# Altium PCB lab1_kondratchenko_usb_rs485.PcbDoc
Units mm, origin at the board's own origin, x right, y up, seen from the top; angles counter-clockwise.
Board outline 52 x 29 mm, 4 copper layers (Top Layer, Signal Layer 1, Signal Layer 2, Bottom Layer), stack 1.522 mm thick; 23 components, 21 nets, 107 pads, 0 vias.
Unrouted connection lines stored in the file: 1.
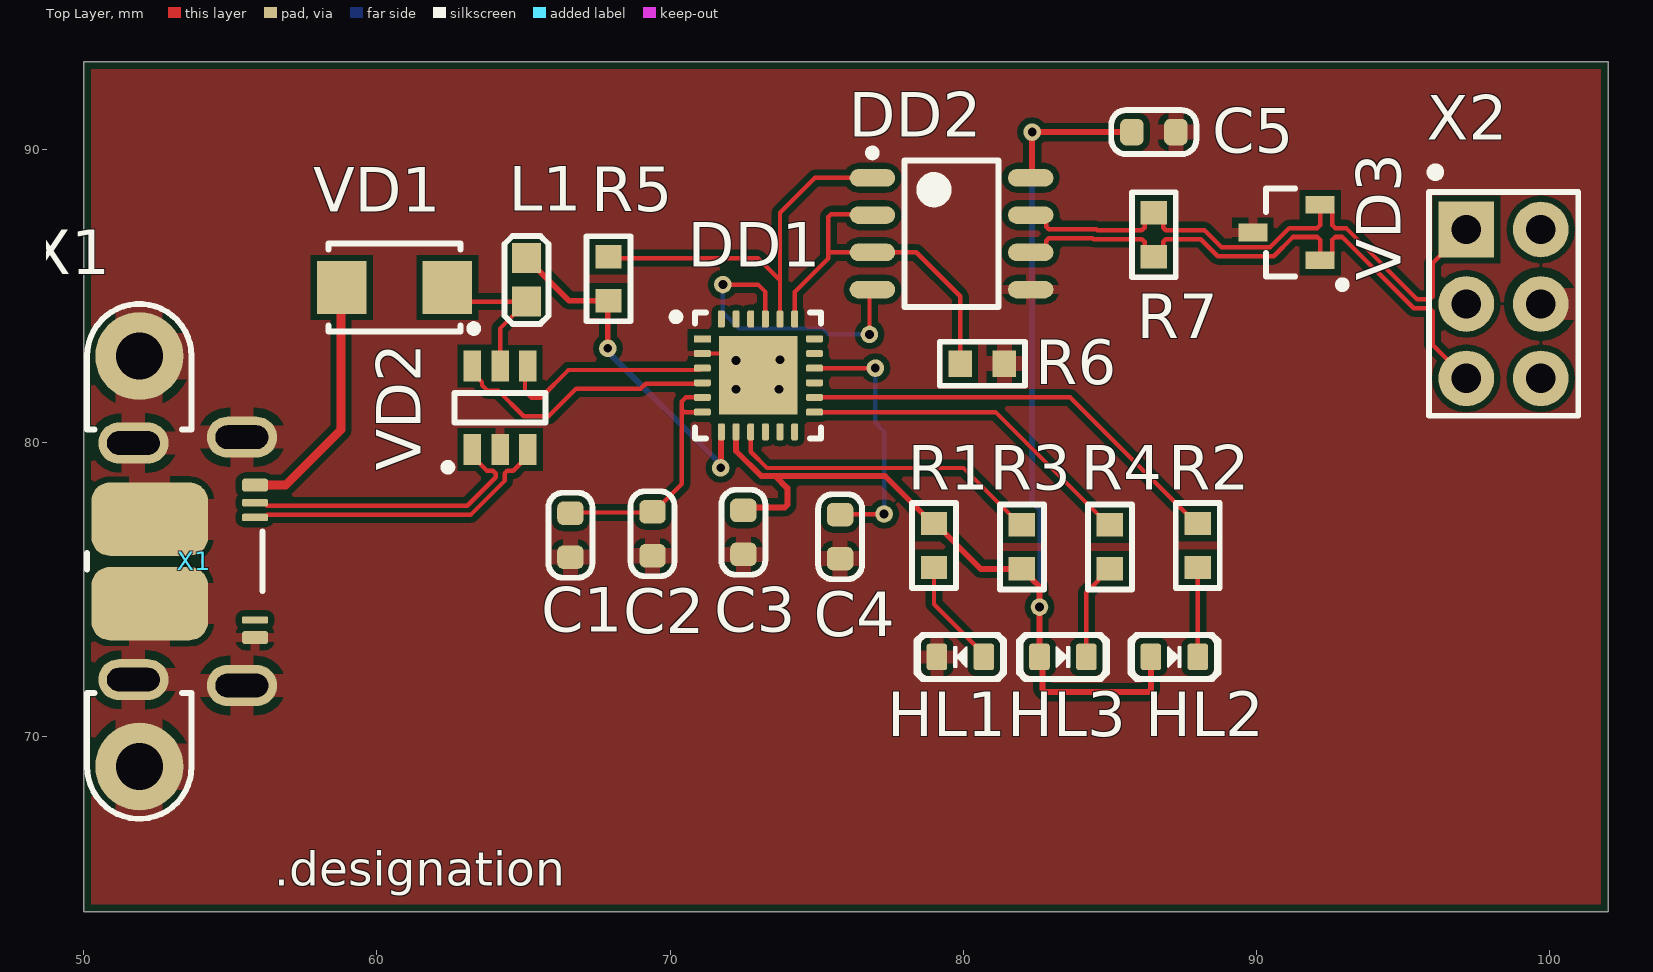
[diagram p0: Top Layer view]
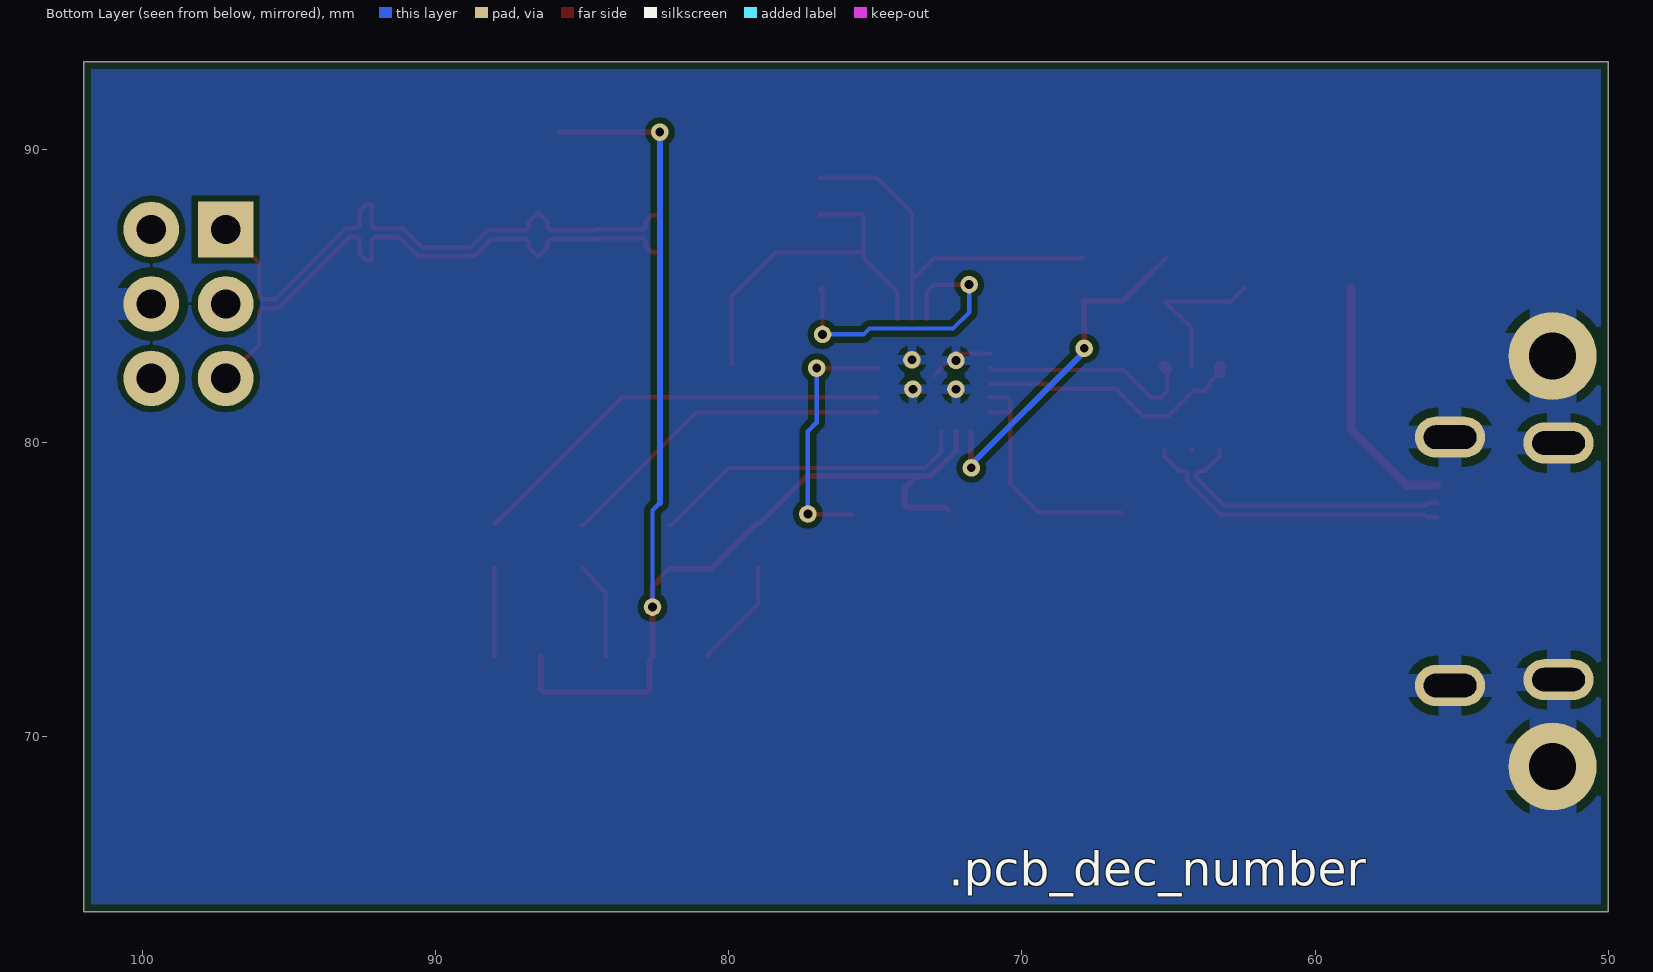
[diagram p1: Bottom Layer view, seen from below]

## Layer stack, top to bottom
Top Solder: solder mask 0.0102, Solder Resist, Dk 3.5
Top Layer: signal copper 0.018
Prepreg 1: prepreg 0.125, FR4 HiTg170, Dk 5.07
Signal Layer 1: signal copper 0.018
Core 1: core 1.2, FR4, Dk 4.6
Signal Layer 2: signal copper 0.018
Prepreg 2: prepreg 0.125, FR4 HiTg170, Dk 5.07
Bottom Layer: signal copper 0.018
Bottom Solder: solder mask 0.0102, Solder Resist, Dk 3.5

## Board outline
50,93 102,93 102,64 50,64

## Design rules (kind name [scope] priority, off if disabled: settings)
AcuteAngle min_acute_angle [OnCopper] p1: minimum=3.50000000000000E+0001 checktracksonly=FALSE // Минимальный угол между примитивами топологии
BoardOutlineClearance board_outline_clearance_std [NOT (OnLayer('Bottom Overlay') OR OnLayer('Top Overlay'))] p1: gap=0.25 ignorepadtopadclearanceinfootprint=FALSE except(0: Arc-SplitContinuation Track-SplitContinuation SMDPad-SplitContinuation THPad-SplitContinuation Via-SplitContinuation Fill-SplitContinuation Poly-SplitContinuation Region-SplitContinuation Text-SplitContinuation) // Отступ элементов топологии от края фрезеруемой печатной платы
Clearance clearance_outer_18um_std [OnTopLayer OR OnBottomLayer] p1: gap=0.125 ignorepadtopadclearanceinfootprint=TRUE except(0.2: Arc-Fill Arc-Poly Track-Fill Track-Poly SMDPad-SMDPad SMDPad-Fill SMDPad-Poly THPad-Fill THPad-Poly Via-Fill Via-Poly Fill-Fill Fill-Poly Poly-Poly Poly-Region Poly-Text; 0.25: Arc-Hole Track-Hole SMDPad-Hole THPad-Hole Via-Hole Fill-Hole Poly-Hole Region-Hole Text-Hole) // Зазоры на внешних слоях
Clearance clearance_inner_18um_std [NOT (OnTopLayer Or OnBottomLayer)] p2: gap=0.125 ignorepadtopadclearanceinfootprint=FALSE except(0.2: Arc-Fill Arc-Poly Track-Fill Track-Poly SMDPad-SMDPad SMDPad-Fill SMDPad-Poly THPad-Fill THPad-Poly Via-Fill Via-Poly Fill-Fill Fill-Poly Poly-Poly Poly-Region Poly-Text; 0.25: Arc-Hole Track-Hole SMDPad-Hole THPad-Hole Via-Hole Fill-Hole Poly-Hole Region-Hole Text-Hole) // Зазоры на внутренних слоях
ComponentClearance [All] p1: gap=0 collisioncheckmode=3 verticalgap=0 showdistances=FALSE
DiffPairsRouting [InDifferentialPair ('USB_D')] p1: maxlimit=0.254 minlimit=0.254 mostfreqgap=0.254 toplayer_minwidth=0.381 toplayer_maxwidth=0.381 toplayer_prefwidth=0.381 midlayer1_minwidth=0.381 midlayer1_maxwidth=0.381 midlayer1_prefwidth=0.381 midlayer2_minwidth=0.381 midlayer2_maxwidth=0.381 midlayer2_prefwidth=0.381 bottomlayer_minwidth=0.381 bottomlayer_maxwidth=0.381 bottomlayer_prefwidth=0.381 maxuncoupledlength=12.7
DiffPairsRouting "Schematic Differential Pairs Routing_5" [InNet('CN_D_N')] p2: maxlimit=0.254 minlimit=0.15 mostfreqgap=0.254 substack1={67195EEF-3907-44E9-BDDF-A21B55EA62EA} substack2={CDF0D0DA-B555-4F8A-8FB6-4BBC3EEBB904} substack3={CB64AA8D-8A62-4D38-B05B-D89D081F4C4C} substack4={ADF6C17C-3291-4EF0-89AD-1B4AAFEC95EE} toplayer_maxgap=0.15 toplayer_prefgap=0.15 toplayer_minwidth=0.155 toplayer_maxwidth=0.155 toplayer_prefwidth=0.155 bottomlayer_maxgap=0.15 bottomlayer_prefgap=0.15 bottomlayer_minwidth=0.155 bottomlayer_maxwidth=0.155 bottomlayer_prefwidth=0.155 substack5={ADBE2DFC-6407-496F-873F-9348D0F1B764} substack6={5F7ABF9E-679D-4FCA-8030-36A110D09790} substack7={999D9EF6-EDBB-4A89-A475-10066F858756} substack8={6E450970-51B5-4B14-929E-B3EE18E1EAC7} impedanceprofiledriven=TRUE impedanceprofileid={1B1F1868-2FFB-4D51-908A-913D90CA9AFC} impedanceprofilevalue=95.000000 maxuncoupledlength=12.7
DiffPairsRouting "Schematic Differential Pairs Routing_4" [InNet('CN_D_P')] p3: maxlimit=0.254 minlimit=0.15 mostfreqgap=0.254 substack1={67195EEF-3907-44E9-BDDF-A21B55EA62EA} substack2={CDF0D0DA-B555-4F8A-8FB6-4BBC3EEBB904} substack3={CB64AA8D-8A62-4D38-B05B-D89D081F4C4C} substack4={ADF6C17C-3291-4EF0-89AD-1B4AAFEC95EE} toplayer_maxgap=0.15 toplayer_prefgap=0.15 toplayer_minwidth=0.155 toplayer_maxwidth=0.155 toplayer_prefwidth=0.155 bottomlayer_maxgap=0.15 bottomlayer_prefgap=0.15 bottomlayer_minwidth=0.155 bottomlayer_maxwidth=0.155 bottomlayer_prefwidth=0.155 substack5={ADBE2DFC-6407-496F-873F-9348D0F1B764} substack6={5F7ABF9E-679D-4FCA-8030-36A110D09790} substack7={999D9EF6-EDBB-4A89-A475-10066F858756} substack8={6E450970-51B5-4B14-929E-B3EE18E1EAC7} impedanceprofiledriven=TRUE impedanceprofileid={1B1F1868-2FFB-4D51-908A-913D90CA9AFC} impedanceprofilevalue=95.000000 maxuncoupledlength=12.7
DiffPairsRouting "Schematic Differential Pairs Routing_3" [InNet('RS485_N')] p4: maxlimit=0.254 minlimit=0.15 mostfreqgap=0.254 substack1={67195EEF-3907-44E9-BDDF-A21B55EA62EA} substack2={CDF0D0DA-B555-4F8A-8FB6-4BBC3EEBB904} substack3={CB64AA8D-8A62-4D38-B05B-D89D081F4C4C} substack4={ADF6C17C-3291-4EF0-89AD-1B4AAFEC95EE} toplayer_maxgap=0.15 toplayer_prefgap=0.15 toplayer_minwidth=0.155 toplayer_maxwidth=0.155 toplayer_prefwidth=0.155 bottomlayer_maxgap=0.15 bottomlayer_prefgap=0.15 bottomlayer_minwidth=0.155 bottomlayer_maxwidth=0.155 bottomlayer_prefwidth=0.155 substack5={ADBE2DFC-6407-496F-873F-9348D0F1B764} substack6={5F7ABF9E-679D-4FCA-8030-36A110D09790} substack7={999D9EF6-EDBB-4A89-A475-10066F858756} substack8={6E450970-51B5-4B14-929E-B3EE18E1EAC7} impedanceprofiledriven=TRUE impedanceprofileid={1B1F1868-2FFB-4D51-908A-913D90CA9AFC} impedanceprofilevalue=95.000000 maxuncoupledlength=12.7
DiffPairsRouting "Schematic Differential Pairs Routing_2" [InNet('RS485_P')] p5: maxlimit=0.254 minlimit=0.15 mostfreqgap=0.254 substack1={67195EEF-3907-44E9-BDDF-A21B55EA62EA} substack2={CDF0D0DA-B555-4F8A-8FB6-4BBC3EEBB904} substack3={CB64AA8D-8A62-4D38-B05B-D89D081F4C4C} substack4={ADF6C17C-3291-4EF0-89AD-1B4AAFEC95EE} toplayer_maxgap=0.15 toplayer_prefgap=0.15 toplayer_minwidth=0.155 toplayer_maxwidth=0.155 toplayer_prefwidth=0.155 bottomlayer_maxgap=0.15 bottomlayer_prefgap=0.15 bottomlayer_minwidth=0.155 bottomlayer_maxwidth=0.155 bottomlayer_prefwidth=0.155 substack5={ADBE2DFC-6407-496F-873F-9348D0F1B764} substack6={5F7ABF9E-679D-4FCA-8030-36A110D09790} substack7={999D9EF6-EDBB-4A89-A475-10066F858756} substack8={6E450970-51B5-4B14-929E-B3EE18E1EAC7} impedanceprofiledriven=TRUE impedanceprofileid={1B1F1868-2FFB-4D51-908A-913D90CA9AFC} impedanceprofilevalue=95.000000 maxuncoupledlength=12.7
DiffPairsRouting "Schematic Differential Pairs Routing_1" [InNet('USB_D_N')] p6: maxlimit=0.254 minlimit=0.15 mostfreqgap=0.254 substack1={67195EEF-3907-44E9-BDDF-A21B55EA62EA} substack2={CDF0D0DA-B555-4F8A-8FB6-4BBC3EEBB904} substack3={CB64AA8D-8A62-4D38-B05B-D89D081F4C4C} substack4={ADF6C17C-3291-4EF0-89AD-1B4AAFEC95EE} toplayer_maxgap=0.15 toplayer_prefgap=0.15 toplayer_minwidth=0.155 toplayer_maxwidth=0.155 toplayer_prefwidth=0.155 bottomlayer_maxgap=0.15 bottomlayer_prefgap=0.15 bottomlayer_minwidth=0.155 bottomlayer_maxwidth=0.155 bottomlayer_prefwidth=0.155 substack5={ADBE2DFC-6407-496F-873F-9348D0F1B764} substack6={5F7ABF9E-679D-4FCA-8030-36A110D09790} substack7={999D9EF6-EDBB-4A89-A475-10066F858756} substack8={6E450970-51B5-4B14-929E-B3EE18E1EAC7} impedanceprofiledriven=TRUE impedanceprofileid={1B1F1868-2FFB-4D51-908A-913D90CA9AFC} impedanceprofilevalue=95.000000 maxuncoupledlength=12.7
DiffPairsRouting "Schematic Differential Pairs Routing" [InNet('USB_D_P')] p7: maxlimit=0.254 minlimit=0.15 mostfreqgap=0.254 substack1={67195EEF-3907-44E9-BDDF-A21B55EA62EA} substack2={CDF0D0DA-B555-4F8A-8FB6-4BBC3EEBB904} substack3={CB64AA8D-8A62-4D38-B05B-D89D081F4C4C} substack4={ADF6C17C-3291-4EF0-89AD-1B4AAFEC95EE} toplayer_maxgap=0.15 toplayer_prefgap=0.15 toplayer_minwidth=0.155 toplayer_maxwidth=0.155 toplayer_prefwidth=0.155 bottomlayer_maxgap=0.15 bottomlayer_prefgap=0.15 bottomlayer_minwidth=0.155 bottomlayer_maxwidth=0.155 bottomlayer_prefwidth=0.155 substack5={ADBE2DFC-6407-496F-873F-9348D0F1B764} substack6={5F7ABF9E-679D-4FCA-8030-36A110D09790} substack7={999D9EF6-EDBB-4A89-A475-10066F858756} substack8={6E450970-51B5-4B14-929E-B3EE18E1EAC7} impedanceprofiledriven=TRUE impedanceprofileid={1B1F1868-2FFB-4D51-908A-913D90CA9AFC} impedanceprofilevalue=95.000000 maxuncoupledlength=12.7
DiffPairsRouting diff_pairs_routing [All] p8: maxlimit=0.254 minlimit=0.127 mostfreqgap=0.254 toplayer_maxgap=0.127 toplayer_prefgap=0.127 toplayer_minwidth=0.143 toplayer_maxwidth=0.143 toplayer_prefwidth=0.143 midlayer1_minwidth=0.381 midlayer1_maxwidth=0.381 midlayer1_prefwidth=0.381 midlayer2_minwidth=0.381 midlayer2_maxwidth=0.381 midlayer2_prefwidth=0.381 bottomlayer_maxgap=0.127 bottomlayer_prefgap=0.127 bottomlayer_minwidth=0.143 bottomlayer_maxwidth=0.143 bottomlayer_prefwidth=0.143 impedanceprofiledriven=TRUE impedanceprofileid={FD46899E-B5A2-4EF5-A302-5D2DB6A51F35} maxuncoupledlength=12.7 // Правила трассировки дифференциальных пар
HoleSize min_hole_size_std [IsPad] p1: absolutevalues=TRUE maxlimit=5.9 minlimit=0.6 maxpercent=80.000 minpercent=20.000 // Диаметр межслойного переходного отверстия
HoleSize min_hole_size_via_std [IsVia] p2: absolutevalues=TRUE maxlimit=5.9 minlimit=0.3 maxpercent=80.000 minpercent=20.000 // Минимальный диаметр монтажного отверстия
HoleToHoleClearance hole_to_hole_clearance_std [All] p1: gap=0.2 allowstackedmicrovias=FALSE // Минимальное расстояние между краями двух отверстий
MatchedLengths [InDifferentialPair ('USB_D')] p1: tolerance=25.4 checknetsindiffpair=FALSE checkdiffpairvsdiffpair=TRUE checkxsignals=TRUE checkothers=TRUE
MinimumAnnularRing min_via_ar_std [All] p1: minimumring=0.15 // Поясок площадки переходного отверстия (Annular ring VIA)
MinimumAnnularRing min_pad_ar_std [All] p2: minimumring=0.2 // Поясок монтажной контактной площадки (Annular ring PAD)
MinimumSolderMaskSliver min_solder_mask_bridge_std [All] p1: minsoldermaskwidth=0.15 // Мнимальная ширина масочного мостика
PlaneClearance plane_clearance_18um_std [All] p1: clearance=0.2 // Отступ полигона (для слоя plane) от элементов топологии
PlaneConnect [All] p1: planeconnectstyle=Relief reliefexpansion=0.5 reliefentries=4 reliefconductorwidth=0.2 reliefairgap=0.2
PolygonConnect poly_connect_to_pad<=0.3 [(AsMM(PadXSize_AllLayers)<=0.301) or (AsMM(PadYSize_AllLayers)<=0.301)] p1: thpad.connectstyle=Relief thpad.reliefconductorwidth=0.2 thpad.reliefentries=4 thpad.polygonreliefangle="90 Angle" thpad.airgapwidth=0.2 smdpad.connectstyle=Relief smdpad.reliefconductorwidth=0.2 smdpad.reliefentries=4 smdpad.polygonreliefangle="90 Angle" smdpad.airgapwidth=0.2 via.connectstyle=Direct via.reliefconductorwidth=0.254 via.reliefentries=4 via.polygonreliefangle="90 Angle" via.airgapwidth=0.254 // Правила подключения полигонов для падов от 0,3мм и меньше
PolygonConnect poly_connect_to_pad<=0.4 [(AsMM(PadXSize_AllLayers)<=0.401) or (AsMM(PadYSize_AllLayers)<=0.401)] p2: thpad.connectstyle=Relief thpad.reliefconductorwidth=0.26 thpad.reliefentries=4 thpad.polygonreliefangle="90 Angle" thpad.airgapwidth=0.2 smdpad.connectstyle=Relief smdpad.reliefconductorwidth=0.26 smdpad.reliefentries=4 smdpad.polygonreliefangle="90 Angle" smdpad.airgapwidth=0.2 via.connectstyle=Direct via.reliefconductorwidth=0.254 via.reliefentries=4 via.polygonreliefangle="90 Angle" via.airgapwidth=0.254 // Правила подключения полигонов для падов от 0,4 и меньше
PolygonConnect poly_connect_to_pad<=0.6 [(AsMM(PadXSize_AllLayers)<=0.601) or (AsMM(PadYSize_AllLayers)<=0.601)] p3: thpad.connectstyle=Relief thpad.reliefconductorwidth=0.33 thpad.reliefentries=4 thpad.polygonreliefangle="90 Angle" thpad.airgapwidth=0.2 smdpad.connectstyle=Relief smdpad.reliefconductorwidth=0.33 smdpad.reliefentries=4 smdpad.polygonreliefangle="90 Angle" smdpad.airgapwidth=0.2 via.connectstyle=Direct via.reliefconductorwidth=0.254 via.reliefentries=4 via.polygonreliefangle="90 Angle" via.airgapwidth=0.254 // Правила подключения полигонов для падов от 0,6мм и меньше
PolygonConnect poly_connect_to_pad<=0.7 [(AsMM(PadXSize_AllLayers)<=0.701) or (AsMM(PadYSize_AllLayers)<=0.701)] p4: thpad.connectstyle=Relief thpad.reliefconductorwidth=0.46 thpad.reliefentries=4 thpad.polygonreliefangle="90 Angle" thpad.airgapwidth=0.2 smdpad.connectstyle=Relief smdpad.reliefconductorwidth=0.46 smdpad.reliefentries=4 smdpad.polygonreliefangle="90 Angle" smdpad.airgapwidth=0.2 via.connectstyle=Direct via.reliefconductorwidth=0.254 via.reliefentries=4 via.polygonreliefangle="90 Angle" via.airgapwidth=0.254 // Правила подключения полигонов для падов от 0,7мм и меньше
PolygonConnect poly_connect_to_pad<=0.8 [(AsMM(PadXSize_AllLayers)<=0.8)or(AsMM(PadYSize_AllLayers)<=0.8)] p5: thpad.connectstyle=Relief thpad.reliefconductorwidth=0.53 thpad.reliefentries=4 thpad.polygonreliefangle="90 Angle" thpad.airgapwidth=0.3 smdpad.connectstyle=Relief smdpad.reliefconductorwidth=0.53 smdpad.reliefentries=4 smdpad.polygonreliefangle="90 Angle" smdpad.airgapwidth=0.2 via.connectstyle=Direct via.reliefconductorwidth=0.254 via.reliefentries=4 via.polygonreliefangle="90 Angle" via.airgapwidth=0.254 // Правила подключения полигонов для падов от 0,8мм и меньше
PolygonConnect poly_connect_to_pad<=1 [(AsMM(PadXSize_AllLayers)<=1.01)or(AsMM(PadYSize_AllLayers)<=1.01)] p6: thpad.connectstyle=Relief thpad.reliefconductorwidth=0.6 thpad.reliefentries=4 thpad.polygonreliefangle="90 Angle" thpad.airgapwidth=0.3 smdpad.connectstyle=Relief smdpad.reliefconductorwidth=0.6 smdpad.reliefentries=4 smdpad.polygonreliefangle="90 Angle" smdpad.airgapwidth=0.2 via.connectstyle=Direct via.reliefconductorwidth=0.254 via.reliefentries=4 via.polygonreliefangle="90 Angle" via.airgapwidth=0.254 // Правила подключения полигонов для падов от 1мм и меньше
PolygonConnect poly_connect_to_pad<=1.3 [(AsMM(PadXSize_AllLayers)<=1.31)or(AsMM(PadYSize_AllLayers)<=1.31)] p7: thpad.connectstyle=Relief thpad.reliefconductorwidth=0.66 thpad.reliefentries=4 thpad.polygonreliefangle="90 Angle" thpad.airgapwidth=0.3 smdpad.connectstyle=Relief smdpad.reliefconductorwidth=0.86 smdpad.reliefentries=4 smdpad.polygonreliefangle="90 Angle" smdpad.airgapwidth=0.2 via.connectstyle=Direct via.reliefconductorwidth=0.254 via.reliefentries=4 via.polygonreliefangle="90 Angle" via.airgapwidth=0.254 // Правила подключения полигонов для падов от 1,3мм и меньше
PolygonConnect poly_connect_to_pad<=1.6 [(AsMM(PadXSize_AllLayers)<=1.61)or(AsMM(PadYSize_AllLayers)<=1.61)] p8: thpad.connectstyle=Relief thpad.reliefconductorwidth=0.8 thpad.reliefentries=4 thpad.polygonreliefangle="90 Angle" thpad.airgapwidth=0.3 smdpad.connectstyle=Relief smdpad.reliefconductorwidth=1 smdpad.reliefentries=4 smdpad.polygonreliefangle="90 Angle" smdpad.airgapwidth=0.2 via.connectstyle=Direct via.reliefconductorwidth=0.254 via.reliefentries=4 via.polygonreliefangle="90 Angle" via.airgapwidth=0.254 // Правила подключения полигонов для падов от 1,6мм и меньше
PolygonConnect poly_connect_to_pad<=1.8 [(AsMM(PadXSize_AllLayers)<=1.8)or(AsMM(PadYSize_AllLayers)<=1.8)] p9: thpad.connectstyle=Relief thpad.reliefconductorwidth=1 thpad.reliefentries=4 thpad.polygonreliefangle="90 Angle" thpad.airgapwidth=0.3 smdpad.connectstyle=Relief smdpad.reliefconductorwidth=1.2 smdpad.reliefentries=4 smdpad.polygonreliefangle="90 Angle" smdpad.airgapwidth=0.2 via.connectstyle=Direct via.reliefconductorwidth=0.254 via.reliefentries=4 via.polygonreliefangle="90 Angle" via.airgapwidth=0.254 // Правила подключения полигонов для падов от 1,8мм и меньше
PolygonConnect poly_connect_to_pad<=2 [(AsMM(PadXSize_AllLayers)<=2.01)or(AsMM(PadYSize_AllLayers)<=2.01)] p10: thpad.connectstyle=Relief thpad.reliefconductorwidth=1.1 thpad.reliefentries=4 thpad.polygonreliefangle="90 Angle" thpad.airgapwidth=0.3 smdpad.connectstyle=Relief smdpad.reliefconductorwidth=1.4 smdpad.reliefentries=4 smdpad.polygonreliefangle="90 Angle" smdpad.airgapwidth=0.2 via.connectstyle=Direct via.reliefconductorwidth=0.254 via.reliefentries=4 via.polygonreliefangle="90 Angle" via.airgapwidth=0.254 // Правила подключения полигонов для падов от 2мм и меньше
PolygonConnect poly_connect_to_pad<=2.3 [(AsMM(PadXSize_AllLayers)<=2.31)or(AsMM(PadYSize_AllLayers)<=2.31)] p11: thpad.connectstyle=Relief thpad.reliefconductorwidth=1.2 thpad.reliefentries=4 thpad.polygonreliefangle="90 Angle" thpad.airgapwidth=0.3 smdpad.connectstyle=Relief smdpad.reliefconductorwidth=1.4 smdpad.reliefentries=4 smdpad.polygonreliefangle="90 Angle" smdpad.airgapwidth=0.2 via.connectstyle=Direct via.reliefconductorwidth=0.254 via.reliefentries=4 via.polygonreliefangle="90 Angle" via.airgapwidth=0.254 // Правила подключения полигонов для падов от 2,3мм и меньше
PolygonConnect poly_connect_to_pad<=2.5 [(AsMM(PadXSize_AllLayers)<=2.51)or(AsMM(PadYSize_AllLayers)<=2.51)] p12: thpad.connectstyle=Relief thpad.reliefconductorwidth=1.2 thpad.reliefentries=4 thpad.polygonreliefangle="90 Angle" thpad.airgapwidth=0.3 smdpad.connectstyle=Relief smdpad.reliefconductorwidth=1.4 smdpad.reliefentries=4 smdpad.polygonreliefangle="90 Angle" smdpad.airgapwidth=0.2 via.connectstyle=Direct via.reliefconductorwidth=0.254 via.reliefentries=4 via.polygonreliefangle="90 Angle" via.airgapwidth=0.254 // Правила подключения полигонов для падов от 2,5мм и меньше
PolygonConnect poly_connect_to_pad<=2.7 [(AsMM(PadXSize_AllLayers)<=2.71)or(AsMM(PadYSize_AllLayers)<=2.71)] p13: thpad.connectstyle=Relief thpad.reliefconductorwidth=1.4 thpad.reliefentries=4 thpad.polygonreliefangle="90 Angle" thpad.airgapwidth=0.3 smdpad.connectstyle=Relief smdpad.reliefconductorwidth=1.6 smdpad.reliefentries=4 smdpad.polygonreliefangle="90 Angle" smdpad.airgapwidth=0.2 via.connectstyle=Direct via.reliefconductorwidth=0.254 via.reliefentries=4 via.polygonreliefangle="90 Angle" via.airgapwidth=0.254 // Правила подключения полигонов для падов от 2,7мм и меньше
PolygonConnect poly_connect_to_pad<=3 [(AsMM(PadXSize_AllLayers)<=3.01)or(AsMM(PadYSize_AllLayers)<=3.01)] p14: thpad.connectstyle=Relief thpad.reliefconductorwidth=1.6 thpad.reliefentries=4 thpad.polygonreliefangle="90 Angle" thpad.airgapwidth=0.3 smdpad.connectstyle=Relief smdpad.reliefconductorwidth=1.8 smdpad.reliefentries=4 smdpad.polygonreliefangle="90 Angle" smdpad.airgapwidth=0.2 via.connectstyle=Direct via.reliefconductorwidth=0.254 via.reliefentries=4 via.polygonreliefangle="90 Angle" via.airgapwidth=0.254 // Правила подключения полигонов для падов от 3мм и меньше
PolygonConnect poly_connect_to_pad<=7 [(AsMM(PadXSize_AllLayers)<7.01)or(AsMM(PadYSize_AllLayers)<=7.01)] p15: thpad.connectstyle=Relief thpad.reliefconductorwidth=2 thpad.reliefentries=4 thpad.polygonreliefangle="90 Angle" thpad.airgapwidth=0.4 smdpad.connectstyle=Relief smdpad.reliefconductorwidth=2 smdpad.reliefentries=4 smdpad.polygonreliefangle="90 Angle" smdpad.airgapwidth=0.3 via.connectstyle=Direct via.reliefconductorwidth=0.254 via.reliefentries=4 via.polygonreliefangle="90 Angle" via.airgapwidth=0.254 // Правила подключения полигонов для падов от 7мм и меньше
PolygonConnect poly_connect_to_pad [All] p16: thpad.connectstyle=Relief thpad.reliefconductorwidth=0.25 thpad.reliefentries=4 thpad.polygonreliefangle="90 Angle" thpad.airgapwidth=0.2 smdpad.connectstyle=Relief smdpad.reliefconductorwidth=0.25 smdpad.reliefentries=4 smdpad.polygonreliefangle="90 Angle" smdpad.airgapwidth=0.2 via.connectstyle=Direct via.reliefconductorwidth=0.25 via.reliefentries=4 via.polygonreliefangle="90 Angle" via.airgapwidth=0.2 // Правила подключения полигонов общие
RoutingCorners [All] p1 off: cornerstyle=45-Degree minsetback=2.5 maxsetback=2.5
RoutingVias [All] p1: holewidth=0.3 width=0.6 viastyle="Through Hole" minholewidth=0.3 minwidth=0.6 maxholewidth=5.9 maxwidth=6.4
SilkToSilkClearance silk_to_silk_clearance_std [All] p1 off: silktosilkclearance=0.15 // Отступ текста шелкографии от других примитивов шелкографии
SilkToSolderMaskClearance silk_to_solder_mask_clearance_std [IsPad] p1 off: minsilkscreentomaskgap=0.15 clearancetoexposedcopper=FALSE // Минимальное расстояние между элементами шелкографии и вскрытой медью
SolderMaskExpansion solder_mask_expansion_std [All] p1: expansion=0.05 // Припуск паяльной масски
UnRoutedNet [All] p1: checkbadconnections=TRUE
Width width_18um_std [All] p1: maxlimit=10 minlimit=0.125 preferedwidth=0.15 checkconnectedcopper=TRUE // Ширина проводников (общая)
19 further rules are at their usual default settings.

## Classes and differential pairs
differential pair class USB_SIGNALS: CN_D RS485 USB_D
differential pair USB_D: +USB_D_P -USB_D_N
differential pair RS485: +RS485_P -RS485_N
differential pair CN_D: +CN_D_P -CN_D_N

## Components (designator, comment, footprint, x,y, rotation, side; value= is the part's Value field where it differs from the comment)
C1 "1 мк" C0603 66.6,76.85 r90 top
C2 "0,1 мк" C0603 69.4,76.9 r90 top
C3 "1 мк" C0603 72.5,76.95 r90 top
C4 "4,7 мк" C0603 75.8,76.8 r90 top
C5 "0,1 мк" C0603 86.5,90.6 r180 top
DD1 "CP2104-F03-GM" QFN-24-400X400X80 73,82.3 r0 top
DD2 "SN65HVD485E" D0008A 79.6,87.135 r0 top
HL1 "TLMY1000-GS08" HL0603 79.9,72.7 r0 top
HL2 "TLMY1000-GS08" HL0603 87.2,72.7 r180 top
HL3 "TLMO1100-GS08" HL0603 83.4,72.7 r180 top
L1 "BLM18KG221SH1D" BLM-2-0603 65.1,85.56 r90 top
R1 "330" R0603 79,76.5 r90 top
R2 "330" R0603 88,76.5 r90 top
R3 "4,7 к" R0603 82,76.45 r90 top
R4 "330" R0603 85,76.45 r90 top
R5 "10 к" R0603 67.9,85.6 r90 top
R6 "10 к" R0603 80.65,82.7 r180 top
R7 "120" R0603 86.5,87.1 r90 top
VD1 "SL13-E3/5AT" DO-214AC 60.6,85.3 r180 top
VD2 "USBLC6-2SC6" SOT-23-6 64.2,81.2 r90 top
VD3 "SM712-02HTG" SOT-23-3 91.025,87.175 r180 top
X1 "2108877-1" 2108877-1 52.146,75.959 r90 top
X2 "DS1021-2x3SF11-B" DS1021-2X3SF11-B 98.43,84.74 r270 top

## Footprints (in the part's own frame and the unit in brackets; to place one, negate y for a bottom-side part, rotate by r counter-clockwise, add the part's x,y. Pads: shape width x height; smd on the part's side, far side on the other; paste and mask are expansions set on the pad)
2108877-1 [mm]
  rrect50% 0.45x0.9 smd: 1(2.6,-3.696) 5(-2.6,-3.696)
  rrect50% 0.25x0.9 smd: 2(2,-3.696) 3(1.5,-3.696) 4(-2,-3.696)
  round 3 hole 1.6: TP1(-7,0.25) TP1(7,0.25)
  oval 1.4x2.4 hole 0.8 slot 1.8 at 90 deg mask+0.102: TP1(-4.235,-3.25) TP1(-4.035,0.45) TP1(4.035,0.45) TP1(4.235,-3.25)
  rrect50% 2.5x3.98 smd: TP1(-1.441,-0.104) TP1(1.441,-0.104)
  silkscreen extent -8.78,-3.95 8.78,2.03, body extent -8.9,-3.95 8.9,3.95, height 3.39
BLM-2-0603 [mm] "Chip Inductor, 2-Leads, Body 1,60x0,80mm, IPC Medium Density"
  rect 1.02x0.98 smd: 1(-0.74,0) 2(0.74,0)
  silkscreen extent -1.5,-0.75 1.5,0.75, body extent -0.8,-0.37 0.8,0.38, height 0.8
C0603 [mm] "Chip Capacitor, 2-Leads, Body 1,60x0,80mm, IPC Medium Density"
  rrect50% 0.8x0.9 smd: 1(-0.75,0) 2(0.75,0)
  silkscreen extent -1.45,-0.75 1.45,0.75, body extent -0.8,-0.4 0.8,0.4, height 0.8
D0008A [mm] "SOIC, 8-Leads, Body 4,91x3,90mm, Pitch 1,27mm, IPC Medium Density"
  oval 1.55x0.6 smd: 1(-2.7,1.905) 2(-2.7,0.635) 3(-2.7,-0.635) 4(-2.7,-1.905) 5(2.7,-1.905) 6(2.7,-0.635) 7(2.7,0.635) 8(2.7,1.905)
  silkscreen extent -2.82,-2.5 1.6,2.88, body extent -2,-2.5 2,2.5, height 1.75
DO-214AC [mm] "Molded Diode, 2-Leads, Body 4,25x2,67mm, IPC Medium Density"
  rect 1.7x1.8 smd: 1(-1.8,0) 2(1.8,0)
  silkscreen extent -2.83,-1.5 2.25,1.52, body extent -2.55,-1.3 2.55,1.3, height 2.26
DS1021-2X3SF11-B [mm]
  rect 1.9x1.9 hole 1: 1(-2.54,-1.27)
  round 1.9 hole 1: 2(0,-1.27) 4(-2.54,1.27)
  round 1.9 hole 1 mask+0.102: 3(2.54,-1.27) 5(0,1.27) 6(2.54,1.27)
  silkscreen extent -4.5,-2.55 3.81,2.54, body extent -3.81,-2.54 3.81,2.54, height 8.59
HL0603 [mm] "Chip Resistor, 2-Leads, Body 1,60x0,80mm, IPC Medium Density"
  rrect25% 0.7x0.9 smd: 1(-0.8,0) 2(0.8,0)
  silkscreen extent -1.5,-0.75 1.5,0.75, body extent -0.81,-0.4 0.81,0.4, height 0.64
QFN-24-400X400X80 [mm] "QFN, 24-Leads, Body 4,00x4,00mm, Pitch 0,50mm, Thermal Pad 2,68x2,68mm, IPC Medium Density"
  rect 2.68x2.68 smd: 0(0,0)
  rect 0.58x0.24 smd: 1(-1.9,1.25)
  rrect50% 0.58x0.24 smd: 2(-1.9,0.75) 3(-1.9,0.25) 4(-1.9,-0.25) 5(-1.9,-0.75) 6(-1.9,-1.25) 13(1.925,-1.25) 14(1.925,-0.75) 15(1.925,-0.25) 16(1.925,0.25) 17(1.925,0.75) 18(1.925,1.25)
  rrect50% 0.24x0.58 smd: 7(-1.25,-1.925) 8(-0.75,-1.925) 9(-0.25,-1.925) 10(0.25,-1.925) 11(0.75,-1.925) 12(1.25,-1.925) 19(1.25,1.925) 20(0.75,1.925) 21(0.25,1.925) 22(-0.25,1.925) 23(-0.75,1.925) 24(-1.25,1.925)
  silkscreen extent -2.92,-2.15 2.15,2.15, body extent -2,-2 2.01,2.01, height 0.9
R0603 [mm] "Chip Resistor, 2-Leads, Body 1,60x0,80mm, IPC Medium Density"
  rect 0.8x0.9 smd: 1(-0.75,0) 2(0.75,0)
  silkscreen extent -1.45,-0.75 1.45,0.75, body extent -0.77,-0.43 0.78,0.43, height 0.43
SOT-23-3 [mm] "SOT-23, 3-Leads, Body 2,92x2,37mm"
  rect 1x0.6 smd: 1(-1.145,0.95) 2(-1.145,-0.95) 3(1.145,0)
  silkscreen extent -2.03,-1.5 0.7,1.9, body extent -1.25,-1.5 1.25,1.5, height 1.1
SOT-23-6 [mm] "SOT-23, 6-Leads, Body 2,90x2,70mm, Pitch 0,95mm, IPC Medium Density"
  rect 1.05x0.6 smd: 1(-1.425,0.95) 2(-1.425,0) 3(-1.425,-0.95) 4(1.425,-0.95) 5(1.425,0) 6(1.425,0.95)
  silkscreen extent -2.16,-1.55 0.5,1.9, body extent -1.41,-1.45 1.41,1.45, height 1.45

## Part data
C1 C3: library part c0090, "=Описание", HelpURL=https://www.yageo.com/upload/media/product/productsearch/datasheet/mlcc/UPY-GPHC_X7R_6.3V-to-50V_20.pdf, ID=c0090, Корпус=0603, Наименование=CC0603KRX7R8BB105, Номинал="1 мк", Номинальное напряжение="25 В", Описание="Конденсатор керамический чип 0603 1 мкФ 25 В ±10 %", Отклонение="±10 %", Производитель="YAGEO Corp.", Рабочие температуры="от –55 °С до +125 °С", Температурный коэффициент емкости=X7R, Фамилия=Ларионов
C2 C5: library part c0060, "=Описание", HelpURL=https://www.yageo.com/upload/media/product/productsearch/datasheet/mlcc/UPY-GPHC_X7R_6.3V-to-50V_20.pdf, ID=c0060, Корпус=0603, Наименование=CC0603JRX7R9BB104, Номинал="0,1 мк", Номинальное напряжение="50 В", Описание="Конденсатор керамический чип 0603 100 нФ 50 В ±5 %", Отклонение="±5 %", Производитель="YAGEO Corp.", Рабочие температуры="от –55 °С до +125 °С", Температурный коэффициент емкости=X7R, Фамилия=Ларионов
  C5: Напряжение="50 В"
C4: library part c0111, "=Описание", HelpURL=https://www.yageo.com/upload/media/product/productsearch/datasheet/mlcc/UPY-GPHC_X5R_4V-to-50V_26.pdf, ID=c0111, Корпус=0603, Наименование=CC0603KRX5R8BB475, Номинал="4,7 мк", Номинальное напряжение="25 В", Описание="Конденсатор керамический чип 0603 4,7 мкФ 25 В ±10 %", Отклонение="±10 %", Производитель="YAGEO Corp.", Рабочие температуры="от –55 °С до +85 °С", Температурный коэффициент емкости=X5R, Фамилия=Ларионов
DD1: library part dd0001, "=Описание", HelpURL=https://www.silabs.com/interface/usb-bridges/classic/device.cp2104, ID=dd0001, Корпус=QFN-24, Наименование=CP2104-F03-GM, Описание="Преобразователь USB-UART", Производитель="Silicon Laboratories", Фамилия=Ларионов
DD2: "=Описание"
HL1 HL2: library part hl0003, "=Описание", HelpURL=https://www.vishay.com/leds/list/product-83172/, ID=hl0003, Корпус=0603, Наименование=TLMY1000-GS08, Номинальная длина волны="588 нм", Номинальная сила света="7,5 мкд", Номинальное падение напряжения="1,8 В", Номинальный прямой ток="15 мА", Описание="Светодиод чип 0603 желтый", Производитель="Vishay Intertechnology, Inc.", Рабочие температуры="от –40 °С до +100 °С", Рассеиваемая мощность="40 мВт", Фамилия=Ларионов
HL3: library part hl0004, "=Описание", HelpURL=https://www.vishay.com/leds/list/product-83173/, ID=hl0004, Корпус=0603, Наименование=TLMO1100-GS08, Номинальная длина волны="606 нм", Номинальная сила света="80 мкд", Номинальное падение напряжения="2,1 В", Номинальный прямой ток="30 мА", Описание="Светодиод чип 0603 оранжевый", Производитель="Vishay Intertechnology, Inc.", Рабочие температуры="от –40 °С до +100 °С", Рассеиваемая мощность="90 мВт", Фамилия=Ларионов
L1: library part l0001, "=Описание", HelpURL=https://www.murata.com/en-global/products/productdetail?partno=BLM18KG221SH1%23, ID=l0001, Корпус=0603, Наименование=BLM18KG221SH1D, Описание="Ферритовая бусина 220 Ом ±25 %", Отклонение, 100 МГц="±25 %", Производитель="Murata Manufacturing Co., Ltd.", Рабочие температуры="от –55 °С до +125 °С", Сопротивление, 100 МГц="220 Ом", Сопротивление при постоянном токе="0,05 Ом", Фамилия=Ларионов
R1: library part r0005, "=Описание", HelpURL=https://www.yageo.com/upload/media/product/productsearch/datasheet/rchip/PYu-RC_Group_51_RoHS_L_11.pdf, ID=r0005, Корпус=0603, Наименование=RC0603FR-07330RL, Номинал=330, Номинальное напряжение="75 В", Номинальный ток="1 А", Описание="Резистор чип 0603 330 Ом ±1 % 0,1 Вт", Отклонение="±1 %", Производитель=Yageo, Рабочие температуры="от -55 °С до +155 °С", Фамилия=Ларионов
R2 R4: library part r0019, "=Описание", HelpURL=https://www.yageo.com/upload/media/product/productsearch/datasheet/rchip/PYu-RC_Group_51_RoHS_L_11.pdf, ID=r0019, Корпус=0603, Наименование=RC0603FR-07330RL, Номинал=330, Номинальное напряжение="75 В", Номинальный ток="1 А", Описание="Резистор чип 0603 330 Ом ±1 % 0,1 Вт", Отклонение="±1 %", Примечание="Ряд E24", Производитель="YAGEO Corp.", Рабочие температуры="от –55 °С до +155 °С", Фамилия=Ларионов
R3: library part r0049, "=Описание", HelpURL=https://www.yageo.com/upload/media/product/productsearch/datasheet/rchip/PYu-RC_Group_51_RoHS_L_11.pdf, ID=r0049, Корпус=0603, Наименование=RC0603FR-074K7L, Номинал="4,7 к", Номинальное напряжение="75 В", Номинальный ток="1 А", Описание="Резистор чип 0603 4,7 кОм ±1 % 0,1 Вт", Отклонение="±1 %", Примечание="Ряд E24", Производитель="YAGEO Corp.", Рабочие температуры="от –55 °С до +155 °С", Фамилия=Ларионов
R5 R6: library part r0060, "=Описание", HelpURL=https://www.yageo.com/upload/media/product/productsearch/datasheet/rchip/PYu-RC_Group_51_RoHS_L_11.pdf, ID=r0060, Корпус=0603, Наименование=RC0603FR-0710KL, Номинал="10 к", Номинальное напряжение="75 В", Номинальный ток="1 А", Описание="Резистор чип 0603 10 кОм ±1 % 0,1 Вт", Отклонение="±1 %", Примечание="Ряд E24", Производитель="YAGEO Corp.", Рабочие температуры="от –55 °С до +155 °С", Фамилия=Самарин
R7: library part r0006, "=Описание", HelpURL=https://www.yageo.com/upload/media/product/productsearch/datasheet/rchip/PYu-RC_Group_51_RoHS_L_11.pdf, ID=r0006, Корпус=0603, Наименование=RC0603FR?-07120RL, Номинал=120, Номинальное напряжение="75 В", Номинальный ток="1 А", Описание="Резистор чип 0603 120 Ом ±1 % 0,1 Вт", Отклонение="±1 %", Производитель=Yageo, Рабочие температуры="от -55 °С до +155 °С", Фамилия=Самарин
VD1: library part vd0003, "=Описание", HelpURL=https://www.vishay.com/product?docid=88740, ID=vd0003, Корпус=DO-214AC, Максимальное обратное напряжение="30 В", Максимальное прямое напряжение="0,445 В", Максимальный прямой ток="1,5 А", Наименование=SL13-E3/5AT, Описание="Диод Шоттки 30 В 1,5 А", Производитель="Vishay Intertechnology, Inc.", Рабочие температуры="от –55 °С до +125 °С", Фамилия=Ларионов
VD2: library part vd0009, "=Описание", HelpURL=https://www.st.com/content/st_com/en/products/protection-devices/esd-protection/usb-port-protection/usblc6-2.html, ID=vd0009, Корпус=SOT-23-6, Наименование=USBLC6-2SC6, Описание="Диодная сборка для подавления помех, от 6 В", Производитель=STMicroelectronics, Фамилия=Ларионов
VD3: library part vd0002, "=Описание", HelpURL=https://www.littelfuse.com/products/tvs-diode-arrays/general-purpose-esd-protection/sm712.aspx, ID=vd0002, Корпус=SOT-23-3, Наименование=SM712-02HTG, Описание="Диодная сборка для подавления помех, –7/12 В", Производитель="Littelfuse, Inc.", Фамилия=Самарин
X1: library part x0001, Contact_1=VBUS, Contact_2=D-, Contact_3=D+, Contact_4=NC, Contact_5=GND, HelpURL=https://www.te.com/global-en/product-2108877-1.html, ID=x0001, Наименование=2108877-1, Описание="USB 2.0 Micro USB Type B IP68 гнездо прямой угол", Производитель="TE Connectivity", Фамилия=Ларионов
X2: library part x0022, "=Описание", Contact_1=B, Contact_2=NC, Contact_3=A, Contact_4=NC, Contact_5=GND, Contact_6=NC, HelpURL=http://en.connfly.group/product/xVkr=EusQssAN0gN=Aos=mU+UrVkR9kqEAN0gN9g+WqANB+A, ID=x0022, Наименование=DS1021-2x3SF11-B, Описание="PLS 2x3 pin 2,54 мм вилка прямой", Производитель="Connfly Electronic Co., Ltd.", Фамилия=Самарин

## Free pads (board coordinates)
  round 0.6 hole 0.3: 2(67.875,83.225) 2(71.725,79.15) 2(71.8,85.4) 2(72.25,81.83) 2(72.25,82.811) 2(73.72,81.83) 2(73.75,82.833) 2(76.8,83.7) 2(77,82.55) 2(77.3,77.575) 2(82.35,90.6) 2(82.6,74.4)

## Nets (pads, with @x,y where several pads share a name; then routed paths per layer and width w, separated by ;. In a path a pad name is that pad's centre, name@x,y a point inside that pad or via, vN(x,y) a via of type N, cw(c..) or ccw(c..) an arc to the next point about the centre after c; other vN are vias at no path point)
+5V: C3.2 C5.2 DD1.7 DD1.8 DD2.8 HL2.2 HL3.2 L1.2 pad.2@67.875,83.225 pad.2@71.725,79.15 pad.2@82.6,74.4 pad.2@82.35,90.6 R1.2 R3.1 R5.1 | length 57.5
  Top Layer w0.15: L1.2 65.1,86.28 65.515,85.865 L1.2@65.535,85.865 ; R5.1@67.875,84.825 R5.1 ; pad.2@71.725,79.15 pad.2@71.737,79.162 ; DD1.7@71.737,80.298 71.705,80.33 DD1.7 ; C3.2 C3.2@72.6,77.8 ; R1.2@78.95,77.25 R1.2 R1.2@79.05,77.25 ; R3.1 82.05,75.7 82.375,75.375 R3.1@82.375,75.325 ; DD2.8 DD2.8@82.35,89.09 ; HL3.2 HL3.2@82.7,72.6
  Top Layer w0.2: L1.2@65.535,85.865 66.55,84.85 R5.1 ; pad.2@67.875,83.225 R5.1@67.875,84.825 ; pad.2@71.737,79.162 DD1.7@71.737,80.298 ; DD1.8 72.25,79.725 73.107,78.868 73.587,78.868 ; C3.2@72.6,77.8 73.912,77.8 74,77.888 74,78.455 73.587,78.868 ; R1.2@78.95,77.25 77.332,78.868 73.587,78.868 ; R1.2@79.05,77.25 80.6,75.7 R3.1 ; DD2.8@82.35,89.09 82.35,90.6 C5.2 ; R3.1@82.375,75.325 82.6,75.1 82.6,74.4 HL3.2 ; HL3.2@82.7,72.6 82.7,71.588 82.788,71.5 86.312,71.5 86.4,71.588 HL2.2
  Bottom Layer w0.15: pad.2@67.875,83.113 pad.2@67.875,83.225 ; pad.2@71.725,79.15 pad.2@71.725,79.263 ; 82.35,77.95 82.6,77.7 82.6,74.4 pad.2@82.675,74.475
  Bottom Layer w0.2: pad.2@67.875,83.113 pad.2@71.725,79.263 ; 82.35,77.95 pad.2@82.35,90.6
CN_5V_IN: VD1.2 X1.1 | length 8.6
  Top Layer w0.15: VD1.2@58.775,85.275 VD1.2
  Top Layer w0.3: X1.1 56.884,78.559 58.775,80.45 VD1.2@58.775,85.275
CN_D_N: VD2.1 X1.2 | length 10
  Top Layer w0.155: X1.2 56.167,77.959 56.264,77.861 63.08,77.861 64.047,78.828 64.047,78.957 63.957,79.047 63.753,79.047 63.25,79.55 VD2.1
CN_D_P: VD2.3 X1.3 | length 10.5
  Top Layer w0.155: X1.3 56.167,77.459 56.264,77.556 63.207,77.556 64.353,78.702 64.353,78.957 64.443,79.047 64.647,79.047 65.15,79.55 VD2.3
D: DD1.21 DD2.4 pad.2@71.8,85.4 pad.2@76.8,83.7 | length 10.5
  Top Layer w0.15: pad.2@71.8,85.4 73,85.4 73.25,85.15 DD1.21 ; pad.2@76.8,83.7 76.8,85.33 DD2.4
  Bottom Layer w0.15: pad.2@71.8,85.4 71.8,84.45 72.35,83.9 75.2,83.9 75.4,83.7 pad.2@76.8,83.7
GND: C1.1 C2.1 C3.1 C4.1 C5.1 DD1.0 DD1.2 DD2.5 HL1.1 pad.2@72.25,81.83 pad.2@72.25,82.811 pad.2@73.72,81.83 pad.2@73.75,82.833 R6.1 VD2.2 VD3.3 X1.5 X1.TP1 X2.5 | length 2.2
  Top Layer w0.15: VD2.2 VD2.2@64.225,79.75 ; DD1.2 72.25,83.05 DD1.0
NetC1_2: C1.2 C2.2 DD1.5 DD1.6 | length 8.5
  Top Layer w0.15: C1.2 66.625,77.625 69.375,77.625 C2.2 69.45,77.65 70.4,78.6 70.4,81.138 ; DD1.6 70.488,81.05 70.4,81.138 ; DD1.5 70.538,81.55 70.4,81.412 70.4,81.138
NetC4_2: C4.2 DD1.16 pad.2@77,82.55 pad.2@77.3,77.575 | length 8.7
  Top Layer w0.15: DD1.16 pad.2@77,82.55 ; C4.2 75.812,77.562 77.287,77.562 pad.2@77.3,77.575
  Bottom Layer w0.15: pad.2@77,82.55 77,80.7 77.3,80.4 pad.2@77.3,77.575
NetHL1_2: HL1.2 R1.1 | length 3.8
  Top Layer w0.15: R1.1 79,74.5 80.7,72.8 HL1.2
NetHL2_1: HL2.1 R2.1 | length 3
  Top Layer w0.15: HL2.1 R2.1
NetHL3_1: HL3.1 R4.1 | length 3.4
  Top Layer w0.15: HL3.1 84.2,74.9 84.625,75.325 84.625,75.375 84.95,75.7 R4.1
NetL1_1: L1.1 VD1.1 VD2.5 | length 5.5
  Top Layer w0.15: VD1.1 62.88,84.82 L1.1 65.1,84.8 64.2,83.9 VD2.5
R: DD1.20 DD2.1 R5.2 | length 13.4
  Top Layer w0.15: R5.2 67.95,86.3 73,86.3 73.75,85.55 ; DD1.20 73.75,85.55 ; DD2.1 74.94,89.04 73.75,87.85 73.75,85.55
RS485_N: DD2.7 R7.2 VD3.2 X2.1 | length 20.4
  Top Layer w0.155: DD2.7 82.621,87.77 82.826,87.564 82.826,87.378 82.917,87.288 84.535,87.288 84.57,87.253 86.092,87.253 86.183,87.343 86.183,87.533 R7.2 86.817,87.533 86.817,87.343 86.908,87.253 88.229,87.253 88.809,86.672 90.464,86.672 91.119,87.328 92.079,87.328 92.17,87.418 VD3.2 92.37,88.125 92.592,87.903 92.592,87.418 92.683,87.328 93.056,87.328 95.491,84.893 95.917,84.893 96.007,84.983 96.007,86.127 X2.1
RS485_P: DD2.6 R7.1 VD3.1 X2.3 | length 20.4
  Top Layer w0.155: DD2.6 82.621,86.5 82.826,86.706 82.826,86.892 82.917,86.982 84.409,86.982 84.444,86.947 86.092,86.947 86.183,86.857 86.183,86.667 R7.1 86.817,86.667 86.817,86.857 86.908,86.947 88.103,86.947 88.683,86.367 90.59,86.367 91.245,87.022 92.079,87.022 92.17,86.932 VD3.1 92.37,86.225 92.592,86.447 92.592,86.932 92.683,87.022 92.93,87.022 95.365,84.587 95.917,84.587 96.007,84.497 96.007,83.353 X2.3
RST: DD1.9 R3.2 | length 11
  Top Layer w0.15: DD1.9 72.75,79.7 73.307,79.143 80.007,79.143 81.95,77.2 R3.2
RTS: DD1.19 DD2.2 DD2.3 R6.2 | length 12.9
  Top Layer w0.15: DD1.19 74.25,85.15 75.4,86.3 75.4,86.5 ; DD2.2 76.87,87.8 75.488,87.8 75.4,87.712 75.4,86.5 ; R6.2 79.9,85 78.4,86.5 DD2.3 75.4,86.5
RX_LED: DD1.13 R4.2 | length 11.7
  Top Layer w0.15: DD1.13 81.1,81.05 84.95,77.2 R4.2
TX_LED: DD1.14 R2.2 | length 15.3
  Top Layer w0.15: DD1.14 83.65,81.55 87.95,77.25 R2.2 R2.2@87.675,77.575
USB_D_N: DD1.4 VD2.6 | length 9.2
  Top Layer w0.15: VD2.6@63.25,82.4 63.585,82.065 63.585,81.969 63.769,81.784 64.134,81.784 65.011,80.908 65.852,80.908 66.796,81.851 69.001,81.851 69.168,82.018 DD1.4@71.068,82.018
  Top Layer w0.381: VD2.6@63.25,82.4 VD2.6
USB_D_P: DD1.3 VD2.4 | length 7.5
  Top Layer w0.15: VD2.4@65.05,82.525 65.05,81.766 65.274,81.543 65.589,81.543 66.533,82.486 69.001,82.486 71.036,82.486 DD1.3
  Top Layer w0.381: VD2.4@65.05,82.525 VD2.4
pads on no net: DD1.1 DD1.10 DD1.11 DD1.12 DD1.15 DD1.17 DD1.18 DD1.22 DD1.23 DD1.24 X1.4 X2.2 X2.4 X2.6

## Polygon pours and split planes (outlines as drawn)
GND on Top Layer "Top Layer-No Net" (solid, pour order 2): 50,93 102,93 102,64 50,64
GND on Top Layer "Top Layer-GND" (solid, pour order 4): 58,87
GND on Bottom Layer "Bottom Layer-GND" (solid, pour order 6): 50,93 102,93 102,64 50,64

## Silkscreen, mask and mechanical layers (free items; w line width, h text height)
Top Overlay:
  text ".designation" at 56.5,64.5 h2
Bottom Overlay:
  text ".pcb_dec_number" at 72.5,64.5 h2
Board:
  lines w0.254: 104.025,63.925 104.05,63.9 ; 50,64 50,93 102,93 102,64 50,64
Assembly Notes (Mech5):
  text "'.title'" at 49.9,97.575 h2
  text "'.project'_'.pcb_dec_number'['.Pcb_File_Name_No_Path']" at 50,94 h2